# Allegro board Grove_Cape.brd
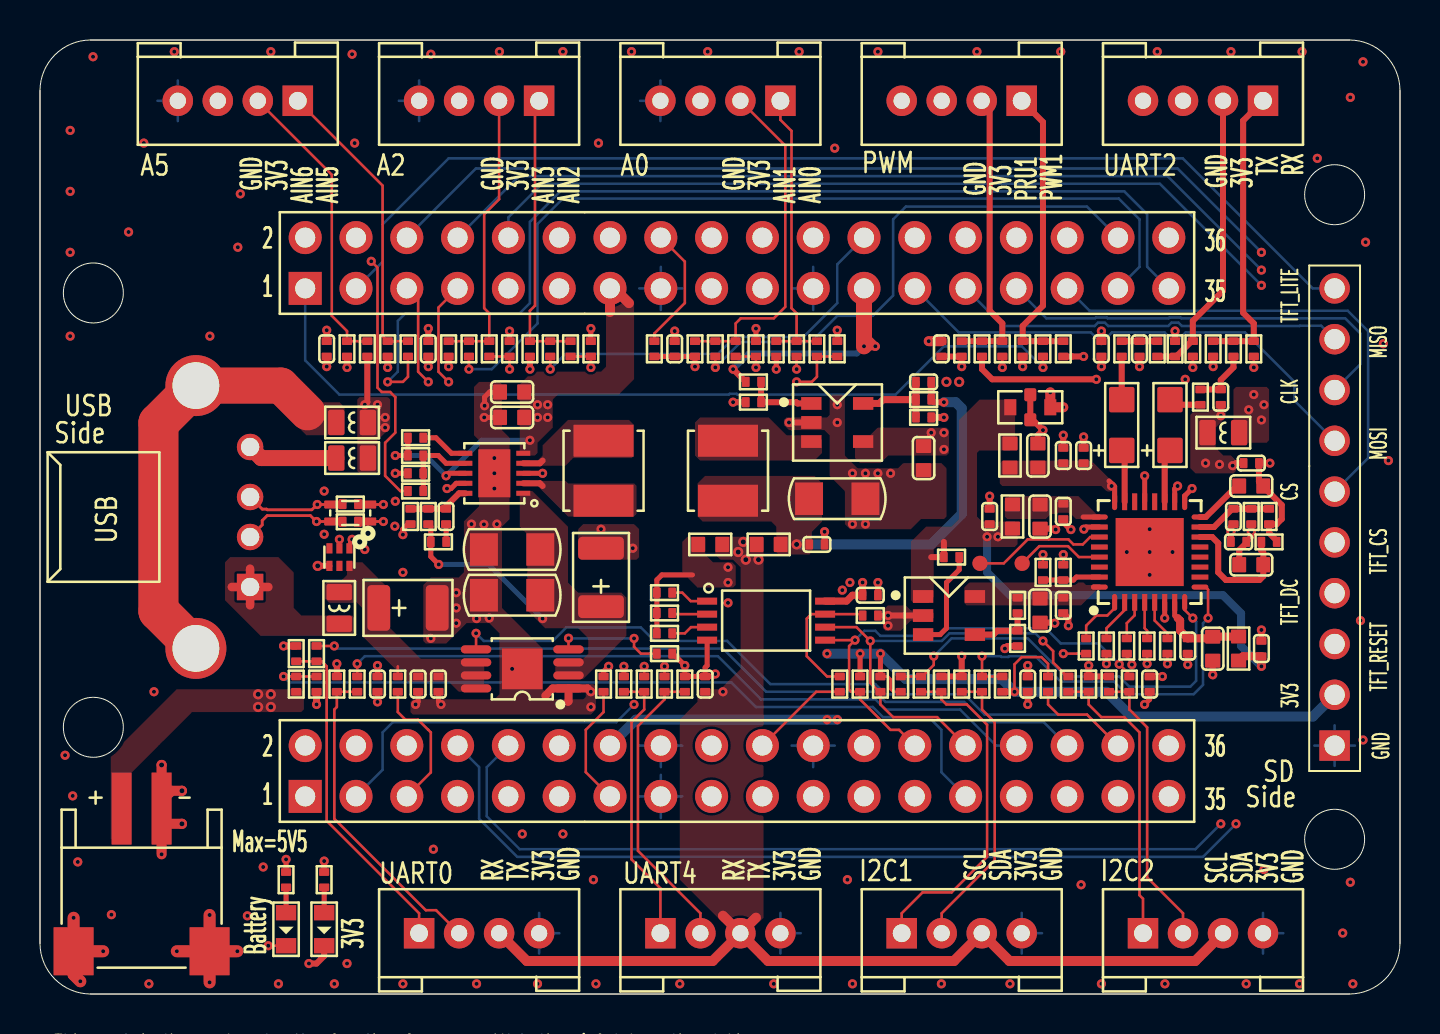
[diagram p0: board, top side]
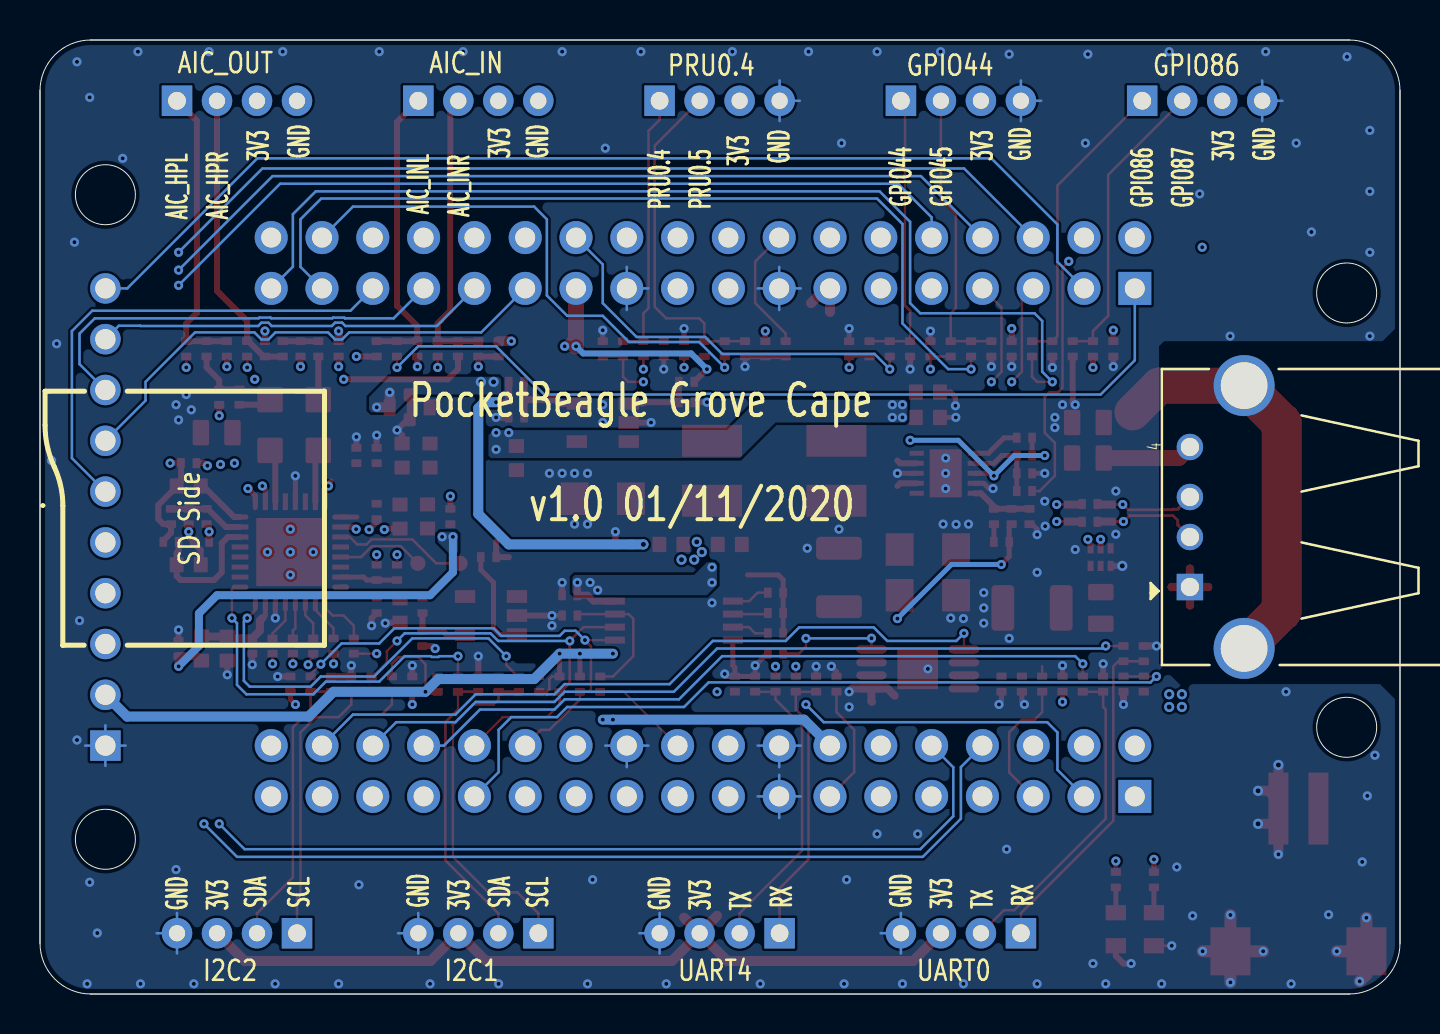
[diagram p1: board, bottom side, seen from below]

Outline 68 x 47.7 mm; copper layers: TOP, GND_2, PWR_3, BOTTOM. Coordinates in mm from the lower left corner of the outline.
Outline path: circle c2.67,35.05 r1.5 ; circle c2.67,13.34 r1.5 ; circle c64.73,39.96 r1.5 ; circle c64.73,7.74 r1.5 ; 0,45.16 0,2.54 ; 0,45.16 arc(0.74,46.96) 2.54,47.7 ; 0,45.16 0,2.54 ; 0,2.54 arc(0.74,0.74) 2.54,0 ; 2.54,47.7 65.46,47.7 ; 2.54,47.7 65.46,47.7 ; 65.46,47.7 arc(67.26,46.96) 68,45.16 ; 2.54,0 65.46,0 ; 2.54,0 65.46,0 ; 65.46,0 arc(67.26,0.74) 68,2.54 ; 68,45.16 68,2.54 ; 68,45.16 68,2.54

## Design rules (mm)
constraint set DEFAULT: min track width 0.127
net group DIFFPAIR36: nets HOST_USB1_DM HOST_USB1_DP
net group USB1: nets USB1_DM USB1_DP

## Placement (name value [footprint] x y rotation side)
C1  100nF  [C0402]  14.34 32.26 270 top
C2  100nF  [C0402]  19.41 32.26 270 top
C3  100nF  [C0402]  31.73 32.26 270 top
C4  100nF  [C0402]  45.07 32.26 270 top
C5  100nF  [C0402]  53.07 32.26 270 top
C6  6.8pF  [C0402]  44.18 30.61 180 top
C7  10uF  [C0603]  23.61 30.1 180 top
C8  0.47uF  [EMI_0805_3]  49.51 29.34 180 top
C9  10uF  [C0603]  23.61 28.83 180 top
C10  47uF  [AVX_A]  54.09 28.45 90 top
C11  47uF  [AVX_A]  56.5 28.45 90 top
C12  100nF  [C0402]  51.16 26.92 90 top
C13  100nF  [C0402]  52.18 26.92 90 top
C14  10uF  [C0603]  49.9 26.92 90 top
C15  10uF  [C0603]  44.18 26.8 270 top
C16  22uF  [C1206]  39.86 24.77 0 top
C17  1uF  [C0603]  60.56 25.4 0 top
C18  100nF  [C0402]  51.16 24.13 270 top
C19  22pF  [C0402]  20.3 23.88 270 top
C20  100nF  [C0402]  47.48 23.88 90 top
C21  10uF  [C0603]  50 23.87 270 top
C22  100nF  [C0402]  38.85 22.48 0 top
C23  22uF  [C1206]  23.61 22.23 180 top
C24  47uF  [AVX_B]  28.05 20.83 90 top
C25  22uF  [C1206]  23.61 19.94 180 top
C26  100nF  [C0402]  41.51 19.94 0 top
C27  1uF  [C0603]  60.56 21.46 180 top
C28  100nF  [C0402]  51.16 19.43 270 top
C29  47uF  [AVX_B]  18.4 19.3 0 top
C30  10uF  [C0603]  50 19.17 270 top
C31  100nF  [C0402]  57.39 17.4 270 top
C32  10uF  [C0603]  58.64 17.27 270 top
C33  100nF  [C0402]  61.07 17.27 90 top
C34  100nF  [C0402]  16.88 15.49 90 top
C35  100nF  [C0402]  18.91 15.49 270 top
C36  100nF  [C0402]  19.92 15.49 270 top
C37  100nF  [C0402]  33.26 15.49 90 top
C38  100nF  [C0402]  49.39 15.49 90 top
C39  100nF  [C0402]  55.48 15.49 90 top
C40  47pF  [C0402]  54.98 32.26 270 top
C41  47pF  [C0402]  59.04 29.84 270 top
C42  47pF  [C0402]  60.56 26.54 180 top
C43  47pF  [C0402]  59.93 22.61 180 top
C44  100nF  [C0402]  59.67 23.88 270 top
D1  TPD1E1B04DPY  [D0402]  16.37 32.26 270 top
D2  TPD1E1B04DPY  [D0402]  17.38 32.26 270 top
D3  TPD1E1B04DPY  [D0402]  20.43 32.26 270 top
D4  TPD1E1B04DPY  [D0402]  24.5 32.26 270 top
D5  TPD1E1B04DPY  [D0402]  32.75 32.26 270 top
D6  TPD1E1B04DPY  [D0402]  36.81 32.26 270 top
D7  TPD1E1B04DPY  [D0402]  46.09 32.26 270 top
D8  TPD1E1B04DPY  [D0402]  49.13 32.26 270 top
D9  TPD1E1B04DPY  [D0402]  56.75 32.26 90 top
D10  TPD1E1B04DPY  [D0402]  58.66 32.26 270 top
D11  TPD1E1B04DPY  [D0402]  12.81 17.02 90 top
D12  TPD1E1B04DPY  [D0402]  14.84 15.49 90 top
D13  TPD1E1B04DPY  [D0402]  29.19 15.49 90 top
D14  TPD1E1B04DPY  [D0402]  32.24 15.49 90 top
D15  TPD1E1B04DPY  [D0402]  45.07 15.49 90 top
D16  TPD1E1B04DPY  [D0402]  46.09 15.49 90 top
D17  TPD1E1B04DPY  [D0402]  52.44 15.49 90 top
D18  TPD1E1B04DPY  [D0402]  53.45 15.49 90 top
FB1  150R  [L0805]  59.17 28.07 180 top
FB2  120R  [L0603]  48.5 26.92 270 top
FB3  120R  [L0603]  48.62 23.88 90 top
FB4  150R  [L0805]  14.96 19.3 270 top
FB5  120R  [L0603]  59.93 17.27 90 top
FB6  150R  [L0805]  15.61 28.57 180 top
FB7  150R  [L0805]  15.61 26.8 180 top
J1  Grove 4P 2.0mm  [HEADER4P-2_0-GROVE-DIP]  9.89 44.66 270 top
J2  Grove 4P 2.0mm  [HEADER4P-2_0-GROVE-DIP]  21.95 44.66 270 top
J3  Grove 4P 2.0mm  [HEADER4P-2_0-GROVE-DIP]  34.02 44.66 270 top
J4  Grove 4P 2.0mm  [HEADER4P-2_0-GROVE-DIP]  46.09 44.66 270 top
J5  Grove 4P 2.0mm  [HEADER4P-2_0-GROVE-DIP]  58.15 44.66 270 top
J6  Header 1x10 2.54mm  [HEADER10P_2D54_DIP]  64.73 12.42 180 top
J7  Header 1x2 2mm  [HW2-SMD-2_0-90D]  5.08 4.32 0 top
J8  Grove 4P 2.0mm  [HEADER4P-2_0-GROVE-DIP]  21.95 3.04 90 top
J9  Grove 4P 2.0mm  [HEADER4P-2_0-GROVE-DIP]  34.02 3.04 90 top
J10  Grove 4P 2.0mm  [HEADER4P-2_0-GROVE-DIP]  46.09 3.04 90 top
J11  Grove 4P 2.0mm  [HEADER4P-2_0-GROVE-DIP]  58.15 3.04 90 top
J12  USB Type A  [USB-003A-4P-90D]  7.79 23.85 90 bottom
L1  3.3uH  [L4X4MM]  28.18 26.16 270 top
L2  1uH  [L4X4MM]  34.4 26.16 270 top
L3  90R  [L2012]  15.51 24.05 180 top
LED1  Green  [LED0603]  12.3 3.24 270 top
LED2  Green  [LED0603]  14.21 3.24 270 top
P1  Header 2x18 2.54mm  [HEADER2X18P_2D54_1_DIP]  13.26 9.88 90 top
P2  Header 2x18 2.54mm  [HEADER2X18P_2D54_1_DIP]  13.26 35.28 90 top
R1  100R  [R0402]  15.35 32.26 270 top
R2  100R  [R0402]  18.4 32.26 270 top
R3  100R  [R0402]  21.45 32.26 270 top
R4  10K  [R0402]  22.46 32.26 270 top
R5  10K  [R0402]  23.48 32.26 90 top
R6  100R  [R0402]  25.51 32.26 270 top
R7  10K  [R0402]  26.53 32.26 270 top
R8  10K  [R0402]  27.54 32.26 90 top
R9  10K  [R0402]  30.72 32.26 270 top
R10  100R  [R0402]  33.77 32.26 270 top
R11  10K  [R0402]  34.78 32.26 270 top
R12  10K  [R0402]  35.8 32.26 90 top
R13  100R  [R0402]  37.83 32.26 270 top
R14  10K  [R0402]  38.85 32.26 270 top
R15  10K  [R0402]  39.86 32.26 90 top
R16  0R  [R0402]  47.1 32.26 270 top
R17  100R  [R0402]  48.12 32.26 270 top
R18  100R  [R0402]  50.15 32.26 270 top
R19  0R  [R0402]  51.16 32.26 270 top
R20  0R  [R0402]  55.86 32.26 90 top
R21  100R  [R0402]  57.64 32.26 270 top
R22  0R  [R0402]  59.67 32.26 270 top
R23  100R  [R0402]  60.69 32.26 270 top
R24  10K  [R0402]  35.67 30.61 0 top
R25  240K  [R0402]  44.18 29.72 180 top
R26  91K  [R0402]  35.67 29.59 180 top
R27  33R  [R0402]  58.02 29.84 90 top
R28  33R  [R0402]  54.09 32.26 90 top
R29  52.3K  [R0402]  44.18 28.83 0 top
R30  0R  [R0402]  18.78 27.81 0 top
R31  0R  [R0402]  18.78 26.92 0 top
R32  0R  [R0402]  18.78 26.04 0 top
R33  0R  [R0402]  18.78 25.15 0 top
R34  2.2k  [R0402]  61.45 23.88 90 top
R35  0R  [R0402]  15.52 24.5 180 top
R36  91K  [R0402]  18.53 23.88 270 top
R37  820K  [R0402]  19.41 23.88 90 top
R38  0R  [R0402]  15.52 23.61 180 top
R39  680K  [R0402]  19.92 22.61 0 top
R40  0R  [R0603]  33.51 22.48 0 top
R41  0R  [R0603]  36.43 22.48 180 top
R42  2.2k  [R0402]  60.56 23.88 90 top
R43  0R  [R0402]  61.45 22.61 0 top
R44  0R  [R0402]  45.58 21.84 0 top
R45  0R  [R0402]  50.15 21.08 270 top
R46  0R  [R0402]  51.16 21.08 270 top
R47  10K  [R0402]  31.23 20.07 0 top
R49  DNP  [R0402]  48.88 19.43 270 top
R50  10K  [R0402]  31.23 19.05 0 top
R51  10K  [R0402]  41.51 18.92 0 top
R52  10K  [R0402]  31.23 18.03 0 top
R53  DNP  [R0402]  48.88 17.78 270 top
R54  0R  [R0402]  52.31 17.4 90 top
R55  0R  [R0402]  53.32 17.4 90 top
R56  0R  [R0402]  54.34 17.4 90 top
R57  0R  [R0402]  55.36 17.4 90 top
R58  0R  [R0402]  56.37 17.4 90 top
R59  100R  [R0402]  13.83 17.02 90 top
R60  10K  [R0402]  31.23 17.02 0 top
R61  20K  [R0402]  12.81 15.49 90 top
R62  10K  [R0402]  13.83 15.49 270 top
R63  100R  [R0402]  15.86 15.49 90 top
R64  0R  [R0402]  17.89 15.49 90 top
R65  0R  [R0402]  28.18 15.49 90 top
R66  100R  [R0402]  30.21 15.49 90 top
R67  100R  [R0402]  31.23 15.49 90 top
R68  0R  [R0402]  39.99 15.49 270 top
R69  10K  [R0402]  41.01 15.49 270 top
R70  10K  [R0402]  42.02 15.49 270 top
R71  10K  [R0402]  43.04 15.49 90 top
R72  100R  [R0402]  44.05 15.49 90 top
R73  100R  [R0402]  47.1 15.49 90 top
R74  10K  [R0402]  48.12 15.49 90 top
R75  10K  [R0402]  50.4 15.49 270 top
R76  100R  [R0402]  51.42 15.49 90 top
R77  100R  [R0402]  54.47 15.49 90 top
R78  680R  [R0402]  12.3 5.71 270 top
R79  680R  [R0402]  14.21 5.71 270 top
TP2  Test Point  [TP30C_SMD]  47 21.53 0 top
TP3  Test Point  [TP30C_SMD]  49.11 21.53 0 top
U1  TLV62569DBVT  [SOT23-5]  39.86 28.57 270 top
U2  MP2155GQ  [QFN10-0_5-3X3X1MM]  22.72 26.04 180 top
U3  TLV320AIC3104  [QFN32_0D5_5X5MM_EP3P3MM]  55.48 22.1 0 top
U4  TPD4S012DRYR  [U_6_DRY]  14.97 21.84 180 top
U5  TLV73318PDBV  [SOT23-5]  45.45 18.92 270 top
U6  CAT24C256YI-GT3  [TSSOP8-0_65-3X4_5X1_2MM]  36.31 18.67 0 top
U7  TPS2051BDGN  [DGN_16X60]  24.11 16.26 90 top

## Library data of the parts
C1-C7 C9 C12-C23 C25-C28 C30-C44 = CC
C8 = EMI_FIL_4P
C10 C11 C24 C29 = CT
D1-D18 = DIODE TVS BI-DIR
FB1-FB7 = FB
J1-J5 J8-J11 = Header_4P
J6 = Header 1x10
J7 = Header_2+2P
J12 = Single USB A
L1 L2 = L
L3 = CL
LED1 LED2 = Single LED
P1 = Header 2x18 Of PocketBeagle P1
P2 = Header 2x18 Of PocketBeagle P2
R1-R47 R49-R79 = R
TP2 TP3 = Test Point
U1 = TLV62569DBVT
U2 = MP2155
U3 = TLV320AIC3104
U4 = TPD4S012
U5 = LDO_5P
U6 = CAT24C256
U7 = TPS2051BDGN

## Footprints (pads in the part's own frame, mm; a bottom-side part is the same pattern mirrored in y, then rotated)
AVX_A
  rrect 1.27x1.27 smd: 1(-1.27,0) 2(1.27,0)
AVX_B
  rrect 1.143x2.286 smd: 1(-1.46,0) 2(1.46,0)
C0402
  rrect 0.385x0.508 smd: 1(-0.383,0) 2(0.383,0)
C0603
  rrect 0.696x0.762 smd: 1(-0.602,0) 2(0.602,0)
C1206
  rect 1.397x1.626 smd: 1(-1.41,0) 2(1.41,0)
D0402
  rrect 0.385x0.508 smd: 1(-0.383,0) 2(0.383,0)
DGN_16X60
  oval 0.406x1.524 smd: 1(-0.975,-2.311) 2(-0.325,-2.311) 3(0.325,-2.311) 4(0.975,-2.311) 5(0.975,2.311) 6(0.325,2.311) 7(-0.325,2.311) 8(-0.975,2.311)
  rect 2.032x2.032 smd: 9(0,0)
EMI_0805_3
  rect 0.6x0.8 smd: 1(-1,0) 3(1,0)
  rrect 0.6x0.65 smd: 2(0,-0.625) 4(0,0.625)
HEADER2X18P_2D54_1_DIP
  rect 1.651x1.651 hole 1: 1(0,0)
  round 1.651 hole 1: 2(2.54,0) 3(0,-2.54) 4(2.54,-2.54) 5(0,-5.08) 6(2.54,-5.08) 7(0,-7.62) 8(2.54,-7.62) 9(0,-10.16) 10(2.54,-10.16) 11(0,-12.7) 12(2.54,-12.7) 13(0,-15.24) 14(2.54,-15.24) 15(0,-17.78) 16(2.54,-17.78) 17(0,-20.32) 18(2.54,-20.32) 19(0,-22.86) 20(2.54,-22.86) 21(0,-25.4) 22(2.54,-25.4) 23(0,-27.94) 24(2.54,-27.94) 25(0,-30.48) 26(2.54,-30.48) 27(0,-33.02) 28(2.54,-33.02) 29(0,-35.56) 30(2.54,-35.56) 31(0,-38.1) 32(2.54,-38.1) 33(0,-40.64) 34(2.54,-40.64) 35(0,-43.18) 36(2.54,-43.18)
HEADER4P-2_0-GROVE-DIP
  rect 1.524x1.524 hole 0.889: 1(0,3)
  round 1.524 hole 0.813: 2(0,1) 3(0,-1) 4(0,-3)
HEADER10P_2D54_DIP
  rect 1.524x1.524 hole 1.016: 1(0,0)
  round 1.524 hole 1.016: 2(0,-2.54) 3(0,-5.08) 4(0,-7.62) 5(0,-10.16) 6(0,-12.7) 7(0,-15.24) 8(0,-17.78) 9(0,-20.32) 10(0,-22.86)
HW2-SMD-2_0-90D
  rect 1x3.6 smd: 1(-1,4.953) 2(1,4.953)
  rect 2x2.4 smd: 3(-3.4,-2.181) 4(3.4,-2.181)
L4X4MM
  rect 1.6x3 smd: 1(-1.5,0) 2(1.5,0)
L0603
  rrect 0.696x0.762 smd: 1(-0.602,0) 2(0.602,0)
L0805
  rrect 0.819x1.27 smd: 1(-0.79,0) 2(0.79,0)
L2012
  rrect 0.75x0.4 smd: 1(-0.925,0.425) 2(0.925,0.425) 3(0.925,-0.425) 4(-0.925,-0.425)
LED0603
  rect 0.762x1.016 smd: 1(-0.826,0) 2(0.826,0)
QFN10-0_5-3X3X1MM
  rect 0.7x0.25 smd: 1(-1.45,1) 2(-1.45,0.5) 3(-1.45,0) 4(-1.45,-0.5) 5(-1.45,-1) 6(1.45,-1) 7(1.45,-0.5) 8(1.45,0) 9(1.45,0.5) 10(1.45,1)
  rect 1.6x2.4 smd: 11(0,0)
QFN32_0D5_5X5MM_EP3P3MM
  oval 0.254x0.838 smd: 1(-1.751,-2.515) 8(1.751,-2.515) 17(1.751,2.515) 24(-1.751,2.515)
  rect 0.254x0.838 smd: 2(-1.251,-2.515) 3(-0.751,-2.515) 4(-0.25,-2.515) 5(0.25,-2.515) 6(0.751,-2.515) 7(1.251,-2.515) 18(1.251,2.515) 19(0.751,2.515) 20(0.25,2.515) 21(-0.25,2.515) 22(-0.751,2.515) 23(-1.251,2.515)
  oval 0.838x0.254 smd: 9(2.515,-1.751) 16(2.515,1.751) 25(-2.515,1.751) 32(-2.515,-1.751)
  rect 0.838x0.254 smd: 10(2.515,-1.251) 11(2.515,-0.751) 12(2.515,-0.25) 13(2.515,0.25) 14(2.515,0.751) 15(2.515,1.251) 26(-2.515,1.251) 27(-2.515,0.751) 28(-2.515,0.25) 29(-2.515,-0.25) 30(-2.515,-0.751) 31(-2.515,-1.251)
  rect 3.404x3.404 smd: 33(0,0)
R0402
  rrect 0.385x0.508 smd: 1(-0.383,0) 2(0.383,0)
R0603
  rrect 0.696x0.762 smd: 1(-0.602,0) 2(0.602,0)
SOT23-5
  rect 0.635x1.016 smd: 1(-0.953,-1.295) 2(0,-1.295) 3(0.953,-1.295) 4(0.953,1.295) 5(-0.953,1.295)
TP30C_SMD
  round 0.762 smd: 1(0,0)
TSSOP8-0_65-3X4_5X1_2MM
  rect 1x0.35 smd: 1(-2.95,0.975) 2(-2.95,0.325) 3(-2.95,-0.325) 4(-2.95,-0.975) 5(2.95,-0.975) 6(2.95,-0.325) 7(2.95,0.325) 8(2.95,0.975)
U_6_DRY
  rect 0.305x0.508 smd: 1(-0.5,-0.439) 2(0,-0.439) 3(0.5,-0.439) 4(0.5,0.439) 5(0,0.439) 6(-0.5,0.439)
USB-003A-4P-90D
  rect 1.321x1.321 hole 0.914: 1(-3.5,2.71)
  round 1.321 hole 0.914: 2(-1,2.71) 3(1,2.71) 4(3.5,2.71)
  round 3.048 hole 2.337: 5(-6.57,0) 6(6.57,0)

## Nets
3V3_FB: C6.2 R25.2 R29.1 U1.5
3V3_SW: L2.1 U1.3
AGND: C4.2 C5.2 C18.2 C20.2 C21.2 C40.2 C41.2 C42.2 C43.2 C44.2 D7.2 D8.2 D9.2 D10.2 FB1.2 J4.4 J5.4 U3.17 U3.26 U3.33
GND: C1.2 C2.2 C3.2 C7.2 C8.2 C8.4 C9.2 C12.2 C13.2 C14.2 C15.2 C16.2 C22.2 C23.2 C24.2 C25.2 C26.2 C28.2 C29.2 C30.2 C31.2 C32.2 C33.2 C34.2 C35.2 C36.2 C37.2 C38.2 C39.2 D1.2 D2.2 D3.2 D4.2 D5.2 D6.2 D11.2 D12.2 D13.2 D14.2 D15.2 D16.2 D17.2 D18.2 FB1.1 FB6.1 FB7.1 J1.4 J2.4 J3.4 J6.1 J7.2 J7.3 J7.4 J8.4 J9.4 J10.4 J11.4 LED1.2(C) LED2.2(C) P1.15 P1.16 P1.22 P2.15 P2.21 R5.2 R8.2 R9.2 R12.2 R15.2 R26.2 R29.2 R32.1 R36.2 R51.2 R53.2 R60.2 R62.2 R65.2 U1.2 U2.3 U2.9 U2.11 U3.6 U3.21 U4.4 U5.2 U6.4 U7.1 U7.9(PAD)
GND_EARTH: FB6.2 J12.5 J12.6
VDD_3V3: C1.1 C2.1 C3.1 C4.1 C5.1 C34.1 C37.1 C38.1 C39.1 J1.3 J2.3 J3.3 J4.3 J5.3 J8.3 J9.3 J10.3 J11.3 R40.2 R41.2 R79.1
AIC_AVDD_3V3: C18.1 C21.1 FB3.2 U3.25
AIC_BCLK: P1.36 R55.1
AIC_DIN: P2.32 R58.1
AIC_DOUT: P2.30 R57.1
AIC_DRVDD_3V3: C12.1 C13.1 C14.1 FB2.2 U3.18 U3.24
AIC_DVDD_1V8: C28.1 C30.1 R49.1 U3.32 U5.5(OUT)
AIC_HPL: C41.1 R22.2 R27.2
AIC_HPR: C40.1 R20.2 R28.2
AIC_INL: C27.2 C43.1 R19.2 R42.1
AIC_INR: C17.2 C42.1 R16.2 R34.1 R43.2
AIC_IOVDD_3V3: C31.1 C32.1 FB5.2 U3.7
AIC_MCLK: P1.29 R54.1
AIC_RESET: P2.28 R45.1
AIC_WCLK: P1.33 R56.1
AIN0(1V8): P1.19 R14.2 R15.1
AIN0/PRU0.4: D6.1 J3.1 R13.1 R14.1
AIN1(1V8): P1.21 R11.2 R12.1
AIN1/PRU0.5: D5.1 J3.2 R10.1 R11.1
AIN2(1V8): P1.23 R7.2 R8.1
AIN2/IO44: D4.1 J2.1 R6.1 R7.1
AIN3(1V8): P1.25 R4.2 R5.1
AIN3/IO45: D3.1 J2.2 R3.1 R4.1
AIN4(1V8): P1.27 R61.2 R62.1
AIN5: D2.1 J1.1 R2.1
AIN5(3V3): P2.35 R2.2
AIN6: D1.1 J1.2 R1.1
AIN6(3V3): P1.2 R1.2
AM3_USB1_VBUS: P1.5 R64.1
BAT_TEMP: P2.16 R9.1
BAT_VIN: J7.1 P2.14 R61.1
BCLK: R55.2 U3.2
DCDC_3V3: C6.1 C16.1 C22.1 L2.2 R25.1 R41.1
DIN: R57.2 U3.4
DOUT: R58.2 U3.5
GPIO20_EEP_WP: P1.20 R68.2
GPIO44: P2.24 R6.2
GPIO45: P2.33 R3.2
GPIO64_LED: P2.20 R78.1
HOST_USB1_DM: J12.2 L3.2 R38.2 U4.2
HOST_USB1_DP: J12.3 L3.3 R35.2 U4.1
HPL: C11.2 R27.1
HPLOUT: C11.1 U3.19
HPR: C10.2 R28.1
HPROUT: C10.1 U3.23
I2C1_SCL: P2.9 R71.2 R72.2 U3.8
I2C1_SDA: P2.11 R73.2 R74.2 U3.9
I2C2_SCL: P1.28 R70.2 R76.2 U6.6
I2C2_SDA: P1.26 R69.2 R77.2 U6.5
LEFT_LOP: TP2.1(TP) U3.27
MCLK: R54.2 U3.1
MIC2L: C27.1 R43.1 U3.14
MIC2R: C17.1 U3.16
MICBIAS: C44.1 R34.2 R42.2 U3.15
MP2155_MODE: P2.18 R33.1
PB_3V3: C8.1 C26.1 J6.2 P1.14 P2.23 R24.1 R40.1 R47.1 R50.1 R52.1 R69.1 R70.1 R71.1 R74.1 R75.1 U6.8
PB_VOUT: C7.1 C9.1 C15.1 P1.24(VOUT) P2.13(VOUT) R30.1 R31.1 U1.4(VIN) U2.5 U2.8
PRU0.4: P1.31 R13.2
PRU0.5: P2.34 R10.2
PRU1.10: P1.35 R17.2
PRU1.10/AIC_INR: D7.1 J4.2 R16.1 R17.1
PWM1A: P2.1 R18.2
PWM1A/AIC_INL: D8.1 J4.1 R18.1 R19.1
RESET: P2.26 R46.1
RIGHT_LOP: TP3.1(TP) U3.29
RX2/AIC_HPL: D10.1 J5.1 R22.1 R23.1
RX_UART0: D11.1 J8.1 R59.1
RX_UART4: D13.1 J9.1 R66.1
SCL_I2C1: D15.1 J10.1 R72.1
SCL_I2C2: D17.1 J11.1 R76.1
SDA_I2C1: D16.1 J10.2 R73.1
SDA_I2C2: D18.1 J11.2 R77.1
SPI1_CLK: J6.8 P2.29
SPI1_CS: J6.6 P2.31
SPI1_MISO: J6.9 P2.27
SPI1_MOSI: J6.7 P2.25
TFT_CARD_CS: J6.5 P2.10
TFT_DC: J6.4 P2.8
TFT_LITE: J6.10 P2.3
TFT_RESET: J6.3 P2.6
TX2/AIC_HPR: D9.1 J5.2 R20.1 R21.1
TX_UART0: D12.1 J8.2 R63.1
TX_UART4: D14.1 J9.2 R67.1
UART0_RX: P1.32 R59.2
UART0_TX: P1.30 R63.2
UART2_RX: P1.8 R23.2
UART2_TX: P1.10 R21.2
UART4_RX: P2.5 R66.2
UART4_TX: P2.7 R67.2
USB1_DM: L3.1 P1.9 R38.1
USB1_DP: L3.4 P1.11 R35.1
USB1_DRVVBUS: P1.3 R60.1 U7.4
USB1_ID: P1.13 R65.1
USB1_OCN: P1.34 R75.2 U7.5
USB1_VBUS: C29.1 C35.1 C36.1 FB4.1 R64.2 U4.6(VBUS) U7.6 U7.7 U7.8
VDAC_3V3: C8.3(OUT) C20.1 C33.1 FB2.1 FB3.1 FB5.1 R44.1 U5.1
VOUT_USB_5V: C23.1 C24.1 C25.1 R37.1 R39.1 U2.1(VOUT) U7.2 U7.3
WCLK: R56.2 U3.3(WCLK)
WP: R51.1 R68.1 U6.7(WP)
N25674303: R44.2 U5.3
N25674638: R45.2 R46.2 U3.31
N25676540: FB4.2 J12.1(VBUS)
N25693204: R24.2 R26.1 U1.1
N25700469: R47.2 U6.1
N25700489: R52.2 U6.3
N25700509: R50.2 U6.2
N25704058: L1.1 U2.4
N25704067: L1.2 U2.2
N25707945: C19.1 R36.1 R37.2 U2.10
N25708464: R30.2 U2.6
N25710467: R31.2 R32.2 R33.2 U2.7
N25712349: C19.2 R39.2
N25750811: R49.2 R53.1 U5.4
N25755713: LED2.1 R79.2
N25755839: LED1.1 R78.2
N25801829: FB7.2 J12.4

Pads without a net: P1 1 4 6 7 12 17 18; P2 2 4 12 17 19 22 36; U3 10 11 12 13 20 22 28 30; U4 3 5

## Via types
v1: diameter 0.457, hole 0.203, TOP to BOTTOM, 292 vias
v2: diameter 0.508, hole 0.254, TOP to BOTTOM, 15 vias

## Routing (per net, layer and track width the routed paths; a pad name or vN(x,y) marks a point on that pad's centre or on a via; arc(x,y) is an arc through that point)
3V3_FB: length 4.5
  TOP w0.35: U1.5 41.97,29.53 42.16,29.72 R25.2 ; R25.2 R29.1 ; R25.2 C6.2
AGND: length 16
  TOP w0.25: v1(57.6,25.27) 57.23,24.9 U3.17 ; v1(52.19,23.24) 52.3,23.35 U3.26
  TOP w0.3: C4.2 D7.2 v1(46.09,31.37) ; C21.2 50.74,23.27 v1(50.78,23.22) ; C5.2 v1(53.07,31.37) ; 56.75,32.64 v1(56.75,33.15) ; D8.2 v1(49.13,31.37) ; 59.67,23.49 59.55,23.36 v1(59.55,23.11) C43.2 ; C40.2 v1(54.98,31.37) ; v1(51.55,23.22) 51.16,23.6 C18.2 ; v1(59.63,26.42) 59.67,26.42 59.8,26.54 C42.2 ; D10.2 v1(58.66,31.37) ; C20.2 v1(47.48,24.89) ; C41.2 v1(59.04,28.91) 59,28.91
  GND_2 w0.427: 43.09,43.65 J4.4 ; J4.4 43.09,45.68 ; J4.4 42.07,44.66 ; 55.15,43.65 J5.4 ; J5.4 54.14,44.66 ; J5.4 55.15,45.68
  vias: v1(54.34,22.1) v1(55.48,23.24) v1(55.48,22.1) v1(55.48,20.95) v1(56.63,22.1) v1(57.26,30.73) v1(58.28,26.54) v1(58.98,26.48)
GND: length 161.5
  TOP w0.127: 12.3,2.41 v1(11.41,2.41)
  TOP w0.25: v1(18.78,14.48) 18.91,14.61 C35.2 ; v1(22.23,29.41) 22.23,29.85 22.48,30.1 C7.2 ; 35.8,32.64 v1(35.8,33.27) ; R60.2 31.65,17.02 v1(32.24,16.43) D14.2 C37.2 ; v1(20.05,14.48) 19.92,14.61 C36.2 ; U3.6 v1(56.23,18.8) ; D13.2 v1(29.19,16.38) ; C37.2 33.64,15.88 v1(33.77,16) ; C37.2 33.26,16.32 33.36,16.42 U6.4 ; 24.17,26.04 v1(25.13,26.04) ; v1(28.43,16.38) 28.18,16.13 R65.2 ; R9.2 C3.2 D5.2 v1(32.75,31.37) ; U2.9 20.81,25.54 20.55,25.27 v1(20.35,25.27) ; 39.86,32.64 v1(39.86,33.19) ; R51.2 v1(42.4,18.92) ; D6.2 v1(36.81,31.24) ; C9.2 v1(22.21,28.83) ; U3.21 v1(55.23,25.91) ; 18.53,23.49 18.39,23.49 18.14,23.24 v1(18.14,22.97) ; 18.4,26.04 v1(17.76,26.04) ; C34.2 v1(16.88,16.43) ; 27.54,32.64 v1(27.54,33.27) ; 23.48,32.64 v1(23.48,33.15)
  TOP w0.3: v1(13.45,1.52) 13.83,1.52 14.21,1.91 14.21,2.41 ; v1(46.09,16.89) D16.2 D15.2 ; C1.2 v1(14.34,31.37) ; C32.2 v1(58.64,15.96) ; C22.2 v1(39.23,23.11) ; C30.2 50.71,18.57 v1(50.74,18.54) ; v1(51.42,18.41) 51.42,18.79 C28.2 ; C14.2 49.9,27.94 v1(50.15,28.19) 49.63,28.71 C8.4 C8.2 ; D3.2 v1(20.43,31.37) ; D2.2 v1(17.38,31.33) ; v1(48.24,17.27) 48.37,17.4 48.88,17.4 ; D1.2 16.37,29.59 v1(16.24,29.46) ; U5.2 v1(42.4,18.92) ; v1(52.44,16.43) D17.2 D18.2 ; 61.07,17.66 v1(61.07,18.2) ; D12.2 v1(14.84,16.51) ; R26.2 v1(34.66,29.59) ; C31.2 v1(57.39,16.47) ; U4.4 v2(13.88,21.41) ; C39.2 56.12,15.88 v1(56.12,15.88) ; C26.2 v1(41.9,20.57) ; U1.2 v1(37.45,28.57) ; C13.2 v1(52.18,27.86) ; C12.2 v1(51.16,27.94) ; C38.2 v1(49.39,16.43) ; v1(24.5,31.24) D4.2 ; C2.2 v1(19.41,31.37)
  TOP w0.35: D11.2 v1(12.18,17.4) ; R62.2 v1(13.83,14.48) ; R29.2 v1(45.2,28.83)
  TOP w0.4: 25.27,14.91 25.63,15.28 U7.1 ; U7.1 27.38,15.28 v1(27.54,15.11) ; U7.1 26.43,14.63 26.4,14.61
  TOP w0.5: 6.08,8.88 J7.2 6.08,9.66 ; 6.08,8.88 6.45,8.51 v2(7.1,8.51) ; 6.08,8.88 v1(6.08,6.99) ; v2(7.1,10.16) 6.58,10.16 6.08,9.66 ; 6.08,9.66 v2(6.08,11.45)
  TOP w0.6: v1(2.02,0.64) 1.68,0.97 J7.3 ; J7.3 v1(1.68,3.81) ; J7.3 v1(3.16,2.14) ; J7.4 v1(8.48,0.58) ; J7.4 v1(9.87,2.14) ; J7.4 v1(8.48,3.95) ; J7.4 v1(6.84,2.14)
  GND_2 w0.427: 31.04,8.8 P1.15 ; P1.15 32.12,9.88 ; P1.15 29.96,9.88 ; P1.15 31.04,10.96 ; J1.4 6.89,45.68 ; J1.4 5.88,44.66 ; J1.4 6.89,43.65 ; J10.4 50.1,3.04 ; J10.4 49.09,4.05 ; J10.4 49.09,2.02 ; P1.22 39.74,12.42 ; P1.22 38.66,13.5 ; P1.22 38.66,11.34 ; P1.22 37.58,12.42 ; P2.15 31.04,36.36 ; P2.15 32.12,35.28 ; P2.15 31.04,34.2 ; P2.15 29.96,35.28 ; J2.4 18.95,45.68 ; J2.4 18.95,43.65 ; J2.4 17.94,44.66 ; P2.21 38.66,36.36 ; P2.21 39.74,35.28 ; P2.21 37.58,35.28 ; P2.21 38.66,34.2 ; J6.1 65.75,12.42 ; J6.1 63.72,12.42 ; J6.1 64.73,13.43 ; J6.1 64.73,11.41 ; P1.16 31.04,13.5 ; P1.16 31.04,11.34 ; P1.16 29.96,12.42 ; P1.16 32.12,12.42 ; 31.02,43.65 J3.4 ; J3.4 31.02,45.68 ; J3.4 30.01,44.66 ; J9.4 37.02,4.05 ; J9.4 37.02,2.02 ; J9.4 38.03,3.04 ; J11.4 61.15,4.05 ; J11.4 62.16,3.04 ; J11.4 61.15,2.02 ; J8.4 24.95,4.05 ; J8.4 25.97,3.04 ; J8.4 24.95,2.02
  BOTTOM w0.127: P1.15 31.04,10.96 ; P1.15 32.12,9.88 ; P1.15 31.04,8.8 ; P1.15 29.96,9.88 ; P2.15 32.12,35.28 ; P2.15 31.04,36.36 ; P2.15 31.04,34.2 ; P2.15 29.96,35.28 ; J9.4 37.02,4.05 ; J9.4 37.02,2.02 ; J9.4 38.03,3.04 ; J10.4 50.1,3.04 ; J10.4 49.09,2.02 ; J10.4 49.09,4.05 ; 64.73,11.41 J6.1 ; J6.1 65.75,12.42 ; J6.1 63.72,12.42 ; J6.1 64.73,13.43 ; J1.4 6.89,45.68 ; J1.4 6.89,43.65 ; J1.4 5.88,44.66 ; J3.4 31.02,45.68 ; J3.4 31.02,43.65 ; J3.4 30.01,44.66 ; J11.4 61.15,4.05 ; J11.4 62.16,3.04 ; J11.4 61.15,2.02 ; 18.95,43.65 J2.4 ; J2.4 17.94,44.66 ; J2.4 18.95,45.68 ; 29.96,12.42 P1.16 ; P1.16 32.12,12.42 ; P1.16 31.04,11.34 ; 37.58,12.42 P1.22 ; P1.22 38.66,11.34 ; P1.22 39.74,12.42 ; 38.66,34.2 P2.21 ; P2.21 38.66,36.36 ; P2.21 37.58,35.28 ; 24.95,2.02 J8.4 ; J8.4 24.95,4.05 ; J8.4 25.97,3.04
  vias: v1(1.25,11.94) v1(1.51,43.18) v1(1.51,40.13) v1(1.51,37.08) v1(1.51,32.89) v1(1.64,9.91) v1(1.89,6.6) v1(2.65,46.86) v1(3.57,3.97) v1(4.43,38.1) v1(5.19,42.55) v1(5.45,0.51) v1(5.7,15.11) v1(6.71,47.12) v1(8.49,32.89) v1(10.02,40.01) v1(10.37,3.91) v1(11.16,6.35) v1(11.54,47.12) v1(11.92,0.51) v1(14.21,25.15) v1(14.21,22.99) v1(14.72,0.51) v1(15.35,1.52) v1(15.61,46.99) v1(15.73,42.55) v1(16.24,22.23) v1(16.88,29.46) v1(17.26,28.83) v1(17.26,28.32) v1(17.74,23.39) v1(17.76,24.64) v1(18.14,21.08) v1(18.14,0.51) v1(19.54,46.99) v1(19.54,17.78) v1(19.67,7.24) v1(20.81,20.07) v1(20.81,19.3) v1(20.81,18.54) v1(21.57,23.5) v1(21.83,18.77) v1(21.83,0.51) v1(22.2,23.48) v1(22.46,18.8) v1(22.72,26.8) v1(22.72,26.04) v1(22.72,25.27) v1(22.84,23.5) v1(22.97,47.12) v1(23.61,16.26) v1(24.11,8) v1(24.88,0.51) v1(26.15,47.12) v1(26.15,8) v1(27.54,14.35) v1(27.67,5.71) v1(27.8,0.51) v1(27.92,42.55) v1(28.05,23.24) v1(29.57,47.12) v1(29.64,22.29) v1(31.99,0.51) v1(33.38,47.12) v1(34.4,19.56) v1(36.69,0.51) v1(37.96,47.12) v1(39.73,42.29) v1(39.86,29.46) v1(39.86,28.57) v1(40.37,5.71) v1(40.62,26.04) v1(40.62,23.5) v1(40.62,0.51) v1(41.27,26.04) v1(41.27,23.5) v1(41.89,47.12) v1(41.89,26.04) v1(42.4,18.41) v1(42.53,26.04) v1(45.07,0.51) v1(46.85,47.12) v1(48.5,0.51) v1(51.04,47.12) v1(52.05,5.46) v1(53.07,0.51) v1(55.86,47.12) v1(56.24,0.51) v1(59.55,47.12) v1(60.31,0.51) v1(60.44,29.21) v1(60.69,29.97) v1(61.07,28.7) v1(61.2,29.46) v1(61.2,6.22) v1(62.98,0.51) v1(63.1,47.12) v1(63.87,41.78) v1(65.14,3.05) v1(65.52,44.83) v1(65.52,5.59) v1(65.64,0.51) v1(66.02,18.67) v1(66.15,46.61) v1(66.15,12.7) v1(66.28,37.59) v1(67.17,32.51) v1(67.42,26.67)
GND_EARTH: length 20.8
  TOP w1.8: J12.6 12.04,30.42 13.38,29.08
  TOP w2: J12.5 5.92,19.15 5.92,28.55 J12.6
VDD_3V3: length 90.1
  TOP w0.25: v1(16.88,14.61) C34.1 ; v1(55.23,14.48) 55.48,14.73 C39.1 ; R79.1 v1(14.21,6.65)
  TOP w0.3: v1(19.41,33.27) 19.41,32.64 ; v1(31.73,33.15) 31.73,32.64 ; C38.1 v1(49.39,14.48) ; v1(14.34,33.19) 14.34,32.64
  TOP w0.4: 53.07,32.64 v1(53.07,33.15)
  TOP w0.5: J11.3 57.76,1.65 48.47,1.65 J10.3 45.7,1.65 36.41,1.65 J9.3 ; 34.15,3.91 J9.3 ; J9.3 33.63,1.65 24.34,1.65 J8.3 ; J9.3 35.8,3.82 ; 45.07,32.64 v1(44.44,32.64)
  PWR_3 w0.427: J4.3 45.93,43.82 ; J4.3 44.24,43.82 ; J4.3 44.24,45.5 ; J4.3 45.93,45.5 ; 58.31,2.2 J11.3 ; J11.3 59.99,3.88 ; J11.3 58.31,3.88 ; J11.3 59.99,2.2 ; 46.24,3.88 J10.3 ; J10.3 47.93,3.88 ; J10.3 47.93,2.2 ; J10.3 46.24,2.2 ; 22.11,3.88 J8.3 ; J8.3 23.8,3.88 ; J8.3 22.11,2.2 ; J8.3 23.8,2.2 ; J5.3 57.99,45.5 ; J5.3 56.31,43.82 ; J5.3 56.31,45.5 ; J5.3 57.99,43.82 ; J3.3 33.86,43.82 ; J3.3 32.18,43.82 ; J3.3 33.86,45.5 ; J3.3 32.18,45.5 ; 34.18,2.2 J9.3 ; J9.3 35.86,3.88 ; J9.3 35.86,2.2 ; J9.3 34.18,3.88 ; 20.11,43.82 J2.3 ; J2.3 21.8,45.5 ; J2.3 21.8,43.82 ; J2.3 20.11,45.5 ; 8.05,43.82 J1.3 ; J1.3 9.73,45.5 ; J1.3 8.05,45.5 ; J1.3 9.73,43.82
  vias: v1(34.15,15.11) v2(34.91,22.1) v2(35.16,22.61) v2(35.29,21.72) v2(35.92,21.72)
AIC_AVDD_3V3: length 0.8
  TOP w0.25: 52.16,23.85 U3.25
AIC_BCLK: length 6.1
  TOP w0.127: R55.1 v1(53.32,16.51)
  PWR_3 w0.127: v1(53.32,16.51) 53.32,15.11 55.3,13.14 55.72,13.14 P1.36
AIC_DIN: length 31.7
  TOP w0.127: R58.1 v1(56.37,16.51)
  PWR_3 w0.127: v1(56.37,16.51) 53.07,19.81 47.1,19.81 46.21,20.7 46.21,24.51 49.01,27.3 49.01,30.35 49.64,30.99 49.64,33.91 50.28,34.54 50.28,36.74 P2.32
AIC_DOUT: length 31.2
  TOP w0.127: R57.1 v1(55.36,16.51)
  PWR_3 w0.127: P2.30 47.48,36.48 47.48,34.42 48.62,33.27 48.62,27.3 45.83,24.51 45.83,20.45 46.85,19.43 52.44,19.43 v1(55.36,16.51)
AIC_DRVDD_3V3: length 5.3
  TOP w0.25: 53.45,25.65 53.73,25.37 U3.24 ; U3.18 56.73,25.25 v1(56.88,25.4)
  PWR_3 w0.3: v1(56.88,25.4) v1(53.58,25.4)
AIC_DVDD_1V8: length 0.3
  TOP w0.25: U3.32 52.68,20.35
AIC_HPL: length 2.9
  TOP w0.3: R27.2 C41.1 59.04,30.7 59.67,31.33 R22.2
AIC_HPR: length 1.8
  TOP w0.3: 55.86,32.64 54.09,32.64
AIC_INL: length 16.5
  TOP w0.3: R19.2 51.61,31.88 51.61,31.88 v1(52.18,31.88) ; 59.96,21.46 59.96,22.19 60.31,22.54 C43.1 60.56,22.86 v1(60.56,23.11) 60.56,23.49
  PWR_3 w0.3: v1(60.56,23.11) 54.47,29.21 53.32,29.21 51.82,30.71 51.82,31.52 v1(52.18,31.88)
AIC_INR: length 22.6
  TOP w0.3: R16.2 47.1,31.24 47.61,30.73 v1(52.82,30.73) ; R43.2 61.84,22.67 61.45,23.05 61.45,23.49 61.83,23.49 62.09,23.75 62.09,24.45 61.16,25.37 C17.2 60.95,25.62 C42.1 v1(61.49,26.54)
  PWR_3 w0.3: v1(61.49,26.54) 60.99,27.05 57.52,27.05 54.72,29.84 53.7,29.84 v1(52.82,30.73)
AIC_IOVDD_3V3: length 4.7
  TOP w0.2: 56.73,18.91 56.85,18.8 56.88,18.8
  TOP w0.25: 56.73,18.91 U3.7
  TOP w0.4: 56.88,18.8 57.01,18.67 57.01,18.16 C31.1 58.55,17.78 C32.1 59.92,17.87 FB5.2
AIC_MCLK: length 9.3
  TOP w0.127: R54.1 51.86,17.02 51.86,17.02 v1(51.16,17.02)
  PWR_3 w0.127: P1.29 49.9,10.96 49.9,12.7 51.16,13.97 v1(51.16,17.02)
AIC_RESET: length 25.3
  TOP w0.127: R45.1 v1(50.15,21.97)
  PWR_3 w0.127: v1(50.15,21.97) 49.51,22.61 49.51,29.97 50.66,31.11 50.66,32.64 52.44,34.42 52.44,38.48 51.93,38.99 47.45,38.99 P2.28
AIC_WCLK: length 12.1
  TOP w0.127: v1(54.59,16.47) 54.59,16.61 54.34,16.86 R56.1
  PWR_3 w0.127: v1(54.59,16.47) 54.59,14.48 55.36,13.72 57.13,13.72 57.64,13.21 57.64,11.96 56.86,11.18 55.2,11.18 P1.33
AIN0(1V8): length 30.7
  TOP w0.127: R15.1 R14.2 38.85,30.86 38.59,30.61 v1(37.83,30.61)
  PWR_3 w0.127: P1.19 37.32,11.08 37.32,13.84 34.42,16.74 34.42,17.93 32.49,19.86 32.49,21.86 32.5,21.86 32.5,28.96 33.55,30.01 37.23,30.01 v1(37.83,30.61)
AIN0/PRU0.4: length 14.4
  TOP w0.127: J3.1 37.02,43.71 37.58,43.15 37.58,34.29 37.83,34.04 37.83,32.64 ; 37.83,32.64 36.81,32.64 ; 37.83,32.64 38.85,32.64
AIN1(1V8): length 32.8
  TOP w0.127: v1(35.8,31.33) R12.1 R11.2
  PWR_3 w0.127: v1(35.8,31.33) 35.21,30.73 33.26,30.73 31.73,29.21 31.73,19.56 33.64,17.65 33.64,16.76 34.66,15.75 34.66,9.02 35.29,8.38 37.16,8.38 P1.21
AIN1/PRU0.5: length 17
  TOP w0.127: 32.75,32.64 34.78,32.64 34.78,33.53 35.04,33.78 36.69,33.78 37.26,34.36 37.26,42.42 J3.2
AIN2(1V8): length 37.8
  TOP w0.127: v1(27.54,31.33) R8.1 R7.2
  PWR_3 w0.127: v1(27.54,31.33) 30.13,31.33 31.35,30.1 31.35,19.43 33.26,17.53 33.26,13.84 32.5,13.08 32.5,9.27 33.77,8 39.32,8 P1.23
AIN2/IO44: length 14.2
  TOP w0.127: J2.1 24.95,44.66 24.75,44.45 24.75,34.42 24.5,34.16 24.5,32.64 26.53,32.64
AIN3(1V8): length 44.8
  TOP w0.127: v1(23.48,31.24) R5.1 R4.2
  PWR_3 w0.127: v1(23.48,31.24) 23.99,30.73 30.08,30.73 30.97,29.84 30.97,19.3 32.88,17.4 32.88,14.1 32.06,13.28 32.06,9.08 33.51,7.62 41.48,7.62 P1.25
AIN3/IO45: length 14.5
  TOP w0.127: 20.43,32.64 22.46,32.64 22.46,34.04 22.21,34.29 22.21,38.99 22.95,39.73 J2.2
AIN4(1V8): length 39.5
  TOP w0.127: v1(12.18,15.88) R61.2 R62.1
  BOTTOM w0.127: v1(12.18,15.88) 12.47,15.58 34.57,15.58 35.8,14.35 41.64,14.35 42.15,13.84 44.43,13.84 45.07,13.21 45.07,11.09 P1.27
AIN5: length 14.9
  TOP w0.127: J1.1 17.13,40.42 17.13,32.9 17.38,32.64 18.4,32.64
AIN5(3V3): length 52.6
  TOP w0.127: R2.2 18.4,30.86 18.15,30.61 v1(17.38,30.61)
  BOTTOM w0.127: v1(17.38,30.61) 17.89,31.11 17.89,33.66 18.27,34.04 23.99,34.04 24.5,34.54 24.5,38.61 26.02,40.13 54.21,40.13 55.36,38.99 55.36,36.36 P2.35
AIN6: length 14.9
  TOP w0.127: 16.37,32.64 15.35,32.64 15.35,33.15 14.59,33.91 14.59,40.96 J1.2
AIN6(3V3): length 22.2
  TOP w0.3: R1.2 v1(15.35,31.33)
  PWR_3 w0.3: P1.2 13.26,16.83 16.75,20.32 16.75,23.24 16.37,23.62 16.37,25.91 14.46,27.81 14.46,30.44 v1(15.35,31.33)
AM3_USB1_VBUS: length 6.8
  TOP w0.127: P1.5 19.54,11.08 19.54,13.08 19.41,13.21 19.41,13.21 18.9,13.72 18.27,13.72 17.89,14.1 R64.1
BAT_TEMP: length 6.3
  TOP w0.127: P2.16 32.24,36.62 32.24,34.55 30.72,33.02 30.72,32.64
BAT_VIN: length 2.2
  PWR_3 w0.927: 29.58,37.82 P2.14 28.5,38.9
  vias: v1(9.89,37.34) v2(10.91,14.99) v2(10.91,14.35) v2(11.54,14.99) v2(11.54,14.35)
BCLK: length 2.2
  TOP w0.127: R55.2 53.32,18.29 54.23,19.2 U3.2
DCDC_3V3: length 16.8
  TOP w0.3: R25.1 44.69,29.59 v1(45.2,29.59)
  TOP w0.35: C6.1 R25.1
  BOTTOM w0.5: v2(37.83,22.48) 44.56,22.48 46.09,24 46.09,29.29 45.78,29.59 v1(45.2,29.59)
DIN: length 1.9
  TOP w0.127: U3.4 55.23,18.29 55.36,18.17 R57.2
DOUT: length 2.1
  TOP w0.127: R58.2 56.37,18.03 55.73,18.67 U3.5
GPIO20_EEP_WP: length 5
  TOP w0.127: P1.20 38.81,15.11 R68.2
GPIO44: length 20.2
  TOP w0.127: R6.2 v1(25.51,31.24)
  BOTTOM w0.127: P2.24 39.86,36.48 39.86,34.54 38.17,32.85 34.74,32.85 33.89,32 26.27,32 v1(25.51,31.24)
GPIO45: length 44.9
  TOP w0.127: v1(21.45,31.24) R3.2
  BOTTOM w0.127: P2.33 54.98,36.35 54.98,38.73 53.94,39.77 26.15,39.77 24.88,38.5 24.88,33.53 22.59,31.24 v1(21.45,31.24)
GPIO64_LED: length 66.5
  TOP w0.25: R78.1 v1(12.3,6.73)
  PWR_3 w0.25: v1(12.3,6.73) 12.3,7.87 9.76,10.41 9.76,17.91 11.54,19.68 11.54,30.48 9.38,32.64 9.38,40.13 10.91,41.66 33.77,41.66 36.12,39.3 P2.20
HOST_USB1_DM: length 8.8
  TOP w0.14: R38.2 15.12,23.62 L3.2 v1(13.83,23.62) 13.81,23.62 13.52,23.92 11.36,23.92 11.11,23.67 11.11,23.46 J12.2 ; U4.2 v1(14.97,22.73)
  PWR_3 w0.14: v1(13.83,23.62) 14.12,23.92 14.91,23.92 15.14,23.69 15.14,23.42 15.04,23.31 14.82,23.31 14.68,23.17 14.68,22.88 14.83,22.73 v1(14.97,22.73)
HOST_USB1_DP: length 8.5
  TOP w0.14: J12.3 11.11,24.24 11.33,24.24 11.36,24.21 13.59,24.21 13.86,24.48 v1(13.86,24.48) L3.3 15.11,24.48 R35.2 ; U4.1 15.47,22.6 v1(15.61,22.73)
  PWR_3 w0.14: v1(15.61,22.73) 15.43,22.91 15.43,23.81 15.03,24.21 14.13,24.21 v1(13.86,24.48)
HPL: length 1.6
  TOP w0.3: C11.2 56.76,29.46 R27.1
HPLOUT: length 2.7
  TOP w0.3: C11.1 56.23,26.91 U3.19
HPR: length 2.2
  TOP w0.3: R28.1 C10.2
HPROUT: length 2.6
  TOP w0.3: U3.23 54.23,27.03 C10.1
I2C1_SCL: length 64.5
  TOP w0.127: U3.8 57.23,19.2 v1(57.64,18.8) ; v1(44.69,16.89) 44.69,16.45 44.11,15.88 R72.2 R71.2
  PWR_3 w0.127: P2.9 24.69,36.55 44.46,36.55 45.07,35.94 45.07,34.78 47.23,32.62 47.23,26.67 44.69,24.13 v1(44.69,16.89)
  BOTTOM w0.127: v1(57.64,18.8) 57.81,18.63 57.81,15.66 57.52,15.37 54.47,15.37 53.96,15.88 51.29,15.88 49.39,17.78 45.58,17.78 v1(44.69,16.89)
I2C1_SDA: length 63.5
  TOP w0.127: v1(47.1,16.89) R73.2 R74.2 ; U3.9 58.28,20.35 58.4,20.22 v1(58.4,18.8)
  PWR_3 w0.127: P2.11 26.98,36.3 44.35,36.3 44.81,35.84 44.81,34.67 46.97,32.51 46.97,26.92 44.18,24.13 44.18,16.64 44.56,16.26 46.47,16.26 v1(47.1,16.89)
  BOTTOM w0.127: v1(47.1,16.89) 48.03,16.89 48.07,16.85 48.42,16.85 48.46,16.89 49.77,16.89 51.04,15.62 53.7,15.62 54.34,14.99 57.68,14.99 58.15,15.46 58.15,18.54 v1(58.4,18.8)
I2C2_SCL: length 22.4
  TOP w0.127: U6.6 40.82,18.34 v1(41.51,17.65) 41.51,15.56 41.96,15.11 R70.2 42.02,14.48 42.66,13.84 44.86,13.84 P1.28 ; R76.2 51.36,15.88 50.66,16.58 50.66,17.14 v1(50.15,17.65)
  BOTTOM w0.127: v1(50.15,17.65) 49.77,18.03 45.47,18.03 45.09,17.65 v1(41.51,17.65)
I2C2_SDA: length 24
  TOP w0.127: U6.5 v1(40.75,17.69) 40.45,17.4 40.45,15.22 40.56,15.11 R69.2 41.01,14.73 42.52,13.21 42.95,13.21 P1.26 ; v1(53.96,16.49) 54.47,15.98 R77.2
  BOTTOM w0.127: v1(53.96,16.49) 52.92,17.53 51.04,17.53 50.28,18.29 45.32,18.29 44.94,17.91 42.02,17.91 41.76,18.16 41.22,18.16 v1(40.75,17.69)
LEFT_LOP: length 6.7
  TOP w0.127: TP2.1 48.19,21.53 49.38,22.73 50.43,22.73 50.44,22.73 51.42,22.73 51.67,22.48 52.14,22.48 52.51,22.85 U3.27
MCLK: length 2.7
  TOP w0.127: R54.2 52.31,18.41 52.82,18.92 53.36,18.92 53.73,19.29 U3.1
MIC2L: length 6.7
  TOP w0.3: U3.14 58.61,22.85 58.91,22.54 58.91,21.08 59.29,20.7 60.97,20.7 61.16,20.89 C27.1 61.16,22.07 61.07,22.16 R43.1
MIC2R: length 2.6
  TOP w0.3: 59.96,25.4 59.84,25.4 58.29,23.85 U3.16
MICBIAS: length 3.8
  TOP w0.3: R34.2 R42.2 C44.1 59.61,24.26 58.7,23.35 U3.15
MP2155_MODE: length 30.6
  TOP w0.127: v1(16.56,36.63) 16.88,36.32 16.88,30.32 17.09,30.1 17.51,30.1 17.76,29.84 17.76,28.07 17.26,27.56 17.26,25.91 18.02,25.15 18.4,25.15
  PWR_3 w0.127: P2.18 32.56,36.8 16.73,36.8 v1(16.56,36.63)
PB_3V3: length 94.5
  TOP w0.127: R70.1 42.4,15.88 42.53,15.75 42.53,15.24 42.66,15.11 R71.1 ; v1(48.73,15.11) 48.73,16.48 49.09,16.84 50.07,16.84 50.4,16.51 R75.1
  TOP w0.25: R69.1 v1(41.01,17.02) ; 32.91,22.45 R40.1 ; 32.62,20.95 31.09,20.95 30.84,20.7 R47.1 R50.1 R52.1 ; R70.1 v1(42.02,17.02)
  TOP w0.3: v1(34.65,31.24) R24.1 ; v1(48.73,15.11) R74.1
  TOP w0.35: v1(41.13,20.58) C26.1 40.62,19.94 40.33,19.64 U6.8
  TOP w0.4: 41.2,32.89 41.26,32.89 v1(41.77,32.38) v1(41.2,32.38)
  TOP w0.5: v1(51.16,29.34) C8.1 v1(50.51,30.08)
  TOP w0.8: P2.23 v1(41.2,32.38)
  PWR_3 w0.8: 44.31,30.61 v2(45.32,30.61) v2(45.96,30.61) ; 44.31,30.61 44.31,30.86 42.78,32.38 v1(41.77,32.38) v1(41.2,32.38) ; 44.31,30.61 44.31,29.59 43.3,28.58 43.3,25.66 42.03,24.39 42.03,23.18 41.13,22.28 v1(41.13,20.58) v1(40.5,20.58) 39.35,19.43 v1(39.35,17.02) 39.35,14.22 ; 39.35,14.22 v1(39.86,13.72) v1(39.35,13.72) 39.35,14.22
  BOTTOM w0.3: v1(41.2,32.38) 40.84,32.03 35.44,32.03 v1(34.65,31.24)
  BOTTOM w0.5: J6.2 63.64,13.87 54.56,13.87 53.33,15.11 v1(48.73,15.11) 48.09,15.75 43.29,15.75 v1(42.02,17.02) v1(41.01,17.02) v1(39.35,17.02) ; v1(39.86,13.72) v1(39.35,13.72) 29.8,13.72 P1.14
  vias: v1(34.4,21.34) v1(34.4,20.57) v1(40.12,20.19)
PB_VOUT: length 30.1
  TOP w0.25: 18.4,27.81 18.4,26.92 v1(17.76,26.92) ; U2.8 20.43,26.04 v1(20.3,25.91)
  TOP w0.3: 28.43,34.04 28.5,34.1
  TOP w0.5: 29.45,34.54 28.71,35.28 P2.13 28.5,34.1
  PWR_3 w0.8: 45.2,27.94 v1(45.2,27.23) 45.2,26.04 43.16,24 43.16,16.38 41.2,14.42 P1.24
  BOTTOM w0.25: v1(24.5,27.69) 22.08,27.69 v1(20.3,25.91) 19.29,26.92 v1(17.76,26.92)
  vias: v1(24.88,29.46) v1(24.88,28.83) v1(25.38,29.46) v1(25.38,28.83) v1(44.56,28.07) v1(45.2,28.07)
PRU0.4: length 49.8
  TOP w0.127: R13.2 v1(37.83,31.24)
  PWR_3 w0.127: v1(37.83,31.24) 36.94,30.35 33.38,30.35 32.11,29.08 32.11,19.68 34.02,17.78 34.02,16.76 35.04,15.75 35.04,9.27 35.54,8.76 36.94,8.76 37.45,9.27 37.45,10.54 38.08,11.18 44.31,11.18 45.07,10.41 45.07,8.51 45.58,8 49.48,8 P1.31
PRU0.5: length 26.9
  TOP w0.127: R10.2 v1(33.77,31.33)
  BOTTOM w0.127: P2.34 52.35,39.37 43.29,39.37 42.66,38.73 42.66,34.92 41.64,33.91 39.86,33.91 38.55,32.6 35.04,32.6 v1(33.77,31.33)
PRU1.10: length 34.6
  TOP w0.127: R17.2 v1(48.12,31.33)
  PWR_3 w0.127: P1.35 55.2,8.64 53.32,8.64 52.85,9.11 52.85,18.49 52.3,19.05 46.59,19.05 45.45,20.19 45.45,24.51 48.12,27.18 v1(48.12,31.33)
PRU1.10/AIC_INR: length 14.5
  TOP w0.3: 46.09,32.64 48.12,32.64 48.12,33.53 47.48,34.16 47.48,44.26 J4.2
PWM1A: length 43.2
  TOP w0.127: R18.2 v1(50.15,31.33)
  BOTTOM w0.127: P2.1 13.26,31.68 14.97,29.97 34.44,29.97 34.48,30.01 34.83,30.01 34.87,29.97 42.78,29.97 45.2,32.38 49.09,32.38 v1(50.15,31.33)
PWM1A/AIC_INL: length 14.9
  TOP w0.3: 51.16,32.64 49.13,32.64 49.13,33.4 50.15,34.42 50.15,43.6 J4.1
RESET: length 28.9
  TOP w0.127: R46.1 v1(51.16,21.97)
  PWR_3 w0.127: v1(51.16,21.97) 50.15,22.99 50.15,27.3 50.66,27.81 50.66,29.46 51.04,29.84 51.04,32.38 52.82,34.16 52.82,38.73 52.05,39.5 45.42,39.5 P2.26
RIGHT_LOP: length 4.4
  TOP w0.127: TP3.1 49.96,22.39 51.4,22.39 51.94,21.85 U3.29
RX2/AIC_HPL: length 14.7
  TOP w0.3: 58.66,32.64 60.69,32.64 60.69,33.53 60.16,34.06 60.16,43.67 J5.1
RX_UART0: length 16.9
  TOP w0.127: D11.1 R59.1 14.08,16.64 14.34,16.38 14.34,8.66 18.95,4.04 J8.1
RX_UART4: length 13.9
  TOP w0.127: D13.1 R66.1 30.21,14.22 29.57,13.59 29.57,6.73 31.02,5.29 J9.1
SCL_I2C1: length 17.3
  TOP w0.127: R72.1 D15.1 45.07,14.73 45.32,14.48 46.34,14.48 47.35,13.46 47.35,6.86 45.58,5.08 44.13,5.08 43.09,4.04 J10.1
SCL_I2C2: length 14.9
  TOP w0.127: J11.1 55.15,4.76 54.98,4.94 54.98,13.08 54.21,13.84 53.07,13.84 52.44,14.47 D17.1 R76.1
SDA_I2C1: length 14.4
  TOP w0.127: J10.2 45.09,4.04 47.74,6.69 47.74,13.59 47.1,14.22 R73.1 D16.1
SDA_I2C2: length 14.2
  TOP w0.127: D18.1 R77.1 54.47,14.22 55.36,13.34 55.36,5.83 57.15,4.04 J11.2
SPI1_CLK: length 21.6
  BOTTOM w0.127: P2.29 50.32,33.78 52.75,33.78 52.79,33.82 53.35,33.82 53.39,33.78 56.44,33.78 56.47,33.82 57.03,33.82 57.07,33.78 65.26,33.78 66.02,33.02 66.02,31.49 J6.8
SPI1_CS: length 24.6
  BOTTOM w0.127: P2.31 52.48,34.16 65.39,34.16 66.41,33.15 66.41,26.79 J6.6
SPI1_MISO: length 19.8
  BOTTOM w0.127: J6.9 64.06,33.41 62.99,33.41 62.98,33.4 57.09,33.4 56.93,33.57 56.58,33.57 56.41,33.4 53.41,33.4 53.24,33.57 52.9,33.57 52.73,33.4 48.16,33.4 P2.27
SPI1_MOSI: length 25.3
  BOTTOM w0.127: P2.25 45.94,33.08 52.54,33.08 52.9,32.73 53.24,32.73 53.6,33.08 56.23,33.08 56.58,32.73 56.93,32.73 57.28,33.08 60.25,33.08 62.72,30.61 62.72,29.67 J6.7
TFT_CARD_CS: length 55.8
  PWR_3 w0.127: J6.5 63.23,24.08 63.23,26.92 62.47,27.69 62.47,34.04 v1(61.07,35.43)
  BOTTOM w0.127: v1(61.07,35.43) 55.99,40.51 25.1,40.51 23.42,38.84 P2.10
TFT_DC: length 62.8
  PWR_3 w0.127: v1(61.07,36.2) 62.72,34.54 62.72,27.81 63.48,27.05 63.48,24.38 63.99,23.88 65.39,23.88 65.77,23.5 65.77,21.08 J6.4
  BOTTOM w0.127: v1(61.07,36.2) 56.37,40.89 23.95,40.89 P2.8
TFT_LITE: length 55.4
  BOTTOM w0.127: J6.10 63.64,35.28 57.13,41.78 20.43,41.78 17.13,38.48 17.13,36.61 P2.3
TFT_RESET: length 68.7
  PWR_3 w0.127: v1(61.07,37.08) 62.98,35.18 62.98,27.94 64.63,26.29 65.52,26.29 66.15,25.65 66.15,19.87 64.73,18.45 J6.3
  BOTTOM w0.127: v1(61.07,37.08) 56.88,41.27 21.8,41.27 P2.6
TX2/AIC_HPR: length 14.7
  TOP w0.3: J5.2 59.15,35.16 57.64,33.66 57.64,32.64 57.58,32.64 56.81,31.88 D9.1 R20.1
TX_UART0: length 16
  TOP w0.127: R63.1 D12.1 14.84,14.35 14.72,14.22 14.72,8.76 19.29,4.19 19.8,4.19 J8.2
TX_UART4: length 14.9
  TOP w0.127: D14.1 R67.1 31.23,14.73 29.9,13.4 29.9,7.16 33.02,4.04 J9.2
UART0_RX: length 39.6
  TOP w0.127: R59.2 v1(14.71,17.4)
  BOTTOM w0.127: P1.32 50.19,13.59 47.23,13.59 46.21,14.61 42.27,14.61 41.77,15.11 36.31,15.11 34.15,17.27 14.84,17.27 v1(14.71,17.4)
UART0_TX: length 35.6
  TOP w0.127: R63.2 v1(15.86,16.51)
  BOTTOM w0.127: v1(15.86,16.51) 16.24,16.89 33.89,16.89 36.05,14.73 41.77,14.73 42.28,14.22 46,14.22 47.8,12.42 P1.30
UART2_RX: length 69
  TOP w0.127: R23.2 v1(60.69,31.33)
  PWR_3 w0.127: v1(60.69,31.33) 62.17,29.85 62.17,27.61 62.98,26.8 62.98,11.68 v1(59.8,8.51)
  BOTTOM w0.127: v1(59.8,8.51) 58.15,6.86 23.86,6.86 21.95,8.76 21.95,11.35 P1.8
UART2_TX: length 70.8
  TOP w0.127: v1(57.64,31.33) R21.2
  PWR_3 w0.127: v1(57.64,31.33) 58.19,31.88 59.29,31.88 60.44,30.73 60.82,30.73 61.91,29.64 61.91,27.48 62.59,26.8 62.59,12.06 v1(59.04,8.51)
  BOTTOM w0.127: v1(59.04,8.51) 57.77,7.24 23.99,7.24 22.34,8.89 22.34,11.34 P1.10
UART4_RX: length 29.9
  TOP w0.127: v1(19.41,30.61) 18.91,31.11 18.91,34.71 P2.5 ; R66.2 v1(30.21,16.38)
  PWR_3 w0.127: v1(30.21,16.38) 30.21,29.34 29.57,29.97 20.05,29.97 v1(19.41,30.61)
UART4_TX: length 29.8
  TOP w0.127: R67.2 v1(31.23,16.38) ; v1(20.43,30.61) 19.92,31.11 19.92,34.32 P2.7
  PWR_3 w0.127: v1(20.43,30.61) 20.73,30.31 29.87,30.31 30.59,29.59 30.59,17.02 v1(31.23,16.38)
USB1_DM: length 20.6
  TOP w0.14: v1(17.17,23.62) 16.44,23.62 16.42,23.61 R38.1
  PWR_3 w0.14: v1(17.17,23.62) 17.45,23.91 18.21,23.91 19,23.12 19,22.53 18.86,22.39 18.73,22.39 18.59,22.25 18.59,21.97 18.73,21.83 18.86,21.83 19,21.69 19,19.18 24.55,13.64 24.55,10.02 24.41,9.88 P1.9
USB1_DP: length 20.6
  TOP w0.14: R35.1 16.41,24.5 16.44,24.48 v1(17.17,24.48)
  PWR_3 w0.14: P1.11 24.98,9.88 24.84,10.02 24.84,13.76 19.29,19.3 19.29,23.24 18.33,24.2 17.45,24.2 v1(17.17,24.48)
USB1_DRVVBUS: length 25.7
  TOP w0.127: v1(29.7,17.78) 29.7,17.36 30.04,17.02 R60.1 ; v1(26.43,17.79) U7.4
  PWR_3 w0.127: v1(29.7,17.78) v1(29.7,14.48)
  BOTTOM w0.127: P1.3 17.13,11.21 17.13,13.08 17.64,13.59 28.81,13.59 v1(29.7,14.48) ; v1(26.43,17.79) 26.44,17.78 v1(29.7,17.78)
USB1_ID: length 6.1
  TOP w0.127: P1.13 27.29,11.09 27.29,13.21 28.18,14.1 R65.1
USB1_OCN: length 40.8
  TOP w0.127: R75.2 50.4,14.48 50.91,13.97 52.35,13.97 P1.34 ; U7.5 v1(21.8,18.03)
  BOTTOM w0.127: P1.34 52.35,13.97 47.23,13.97 46.21,14.99 42.66,14.99 42.65,14.98 42.28,14.98 41.77,15.49 36.52,15.49 34.36,17.65 30.72,17.65 30.04,18.33 26.32,18.33 25.64,17.65 22.18,17.65 v1(21.8,18.03)
USB1_VBUS: length 0.5
  TOP w0.127: R64.2 17.89,16.38
VDAC_3V3: length 21.5
  TOP w0.3: 45.19,22.6 R44.1 44.56,21.84
  TOP w0.4: FB5.1 60.15,16.89 C33.1 v1(61.07,16.38)
  BOTTOM w0.4: v1(61.07,16.38) 60.05,17.4 60.05,19.03 59.15,19.94 48.5,19.94 47.35,21.08 v1(47.35,22.86)
  vias: v1(47.89,22.86)
VOUT_USB_5V: length 8.5
  TOP w0.25: 19.41,23.49 19.54,23.37 R39.1 19.54,21.87 v1(19.94,21.48)
  BOTTOM w0.25: v1(19.94,21.48) 22.42,21.48 v1(25.13,18.77)
WCLK: length 2
  TOP w0.127: U3.3 54.73,18.93 54.34,18.54 R56.2
WP: length 6.9
  TOP w0.127: R51.1 41.06,18.99 U6.7 38.57,18.99 38.34,18.77 38.34,16.89 39.35,15.88 R68.1
N25674303: length 5.1
  TOP w0.25: R44.2 45.96,21.21 45.32,20.57 45.32,18.29 45.01,17.97 U5.3
N25674638: length 2.9
  TOP w0.25: R45.2 R46.2 51.67,20.7 51.82,20.85 52.97,20.85
N25676540: length 3.7
  TOP w0.427: J12.1 11.42,20.35 ; J12.1 10.5,19.44 ; J12.1 9.59,20.35 ; J12.1 10.5,21.26
N25693204: length 3.6
  TOP w0.3: U1.1 37.87,29.53 37.8,29.59 R26.1 R24.2
N25700469: length 1.9
  TOP w0.127: U6.1 32.54,19.64 32.11,20.07 R47.2
N25700489: length 1.9
  TOP w0.127: R52.2 32.24,18.03 32.55,18.34 U6.3
N25700509: length 1.8
  TOP w0.127: U6.2 31.66,18.99 R50.2
N25704058: length 1
  TOP w0.3: 24.17,26.54 25,26.54 25.13,26.67
N25704067: length 1
  TOP w0.3: 25.13,25.4 25,25.54 24.17,25.54
N25707945: length 3.1
  TOP w0.3: R36.1 R37.2 C19.1 20.3,24.38 20.95,25.04 U2.10
N25708464: length 2.4
  TOP w0.25: U2.6 20.57,27.04 19.8,27.81 R30.2
N25710467: length 4
  TOP w0.25: U2.7 20.3,26.54 19.91,26.92 R31.2 R32.2 R33.2
N25712349: length 0.9
  TOP w0.25: R39.2 20.31,23.49 20.3,23.49
N25750811: length 3.1
  TOP w0.3: R49.2 R53.1 47.86,18.16 47.67,17.97 U5.4
N25755713: length 1.3
  TOP w0.25: LED2.1 R79.2
N25755839: length 1.3
  TOP w0.25: LED1.1 R78.2
N25801829: length 4.5
  TOP w0.8: J12.4 11.06,26.8 FB7.2

## Copper pours and planes (outline as drawn; the poured copper is in the pictures)
3V3_SW on TOP: 38.85,27.94 37.32,27.94 36.43,28.83 33,28.83 32.75,28.57 32.75,26.92 33,26.67 38.72,26.67 39.1,27.05 39.1,27.69
AGND on TOP: 59.17,29.21 58.53,29.21 58.4,29.08 57.64,29.08 57.52,28.96 57.52,26.29 57.77,26.04 59.67,26.04 59.8,26.16 59.8,26.67 59.55,26.92 59.17,26.92 58.78,27.3 58.78,28.32 59.29,28.83 59.29,29.08
AGND on GND_2: 57.64,20.7 57.26,20.32 54.34,20.32 53.45,21.21 52.18,21.21 51.67,21.72 51.67,21.84 51.29,22.23 50.02,22.23 49.9,22.1 49.9,21.72 49.13,20.95 46.85,20.95 46.59,21.21 46.59,24.64 47.35,25.4 51.67,25.4 52.56,26.29 52.56,28.83 50.91,30.48 45.96,30.48 45.07,31.37 45.07,38.73 41.51,42.29 41.51,45.59 42.02,46.1 61.58,46.1 62.34,45.34 62.34,43.69 60.82,42.16 60.82,34.42 61.2,34.04 61.2,31.37 61.07,31.24 59.93,31.24 59.29,30.61 59.29,28.07 59.67,27.69 61.45,27.69 62.21,26.92 62.21,21.08 61.58,20.45 59.04,20.45 58.78,20.7
AGND on PWR_3: 59.04,20.45 58.78,20.7 57.64,20.7 57.26,20.32 54.34,20.32 53.45,21.21 52.18,21.21 51.29,22.1 51.29,25.02 52.56,26.29 52.56,28.83 51.29,30.1 51.29,32.13 51.67,32.51 55.86,32.51 59.29,29.08 59.29,28.07 59.67,27.69 61.45,27.69 62.21,26.92 62.21,21.08 61.58,20.45
GND on TOP: 59.8,30.35 61.33,30.35 61.45,30.23 61.45,27.69 61.33,27.56 59.8,27.56 59.67,27.69 59.67,30.23
GND on TOP: 27.16,23.5 29.7,23.5 29.96,23.24 29.96,21.84 29.83,21.72 27.04,21.72 26.91,21.84 26.91,23.24
GND on TOP: 19.16,17.65 19.16,20.45 19.54,20.83 20.94,20.83 21.19,21.08 21.19,23.62 21.95,24.38 21.95,27.69 21.7,27.94 21.7,30.35 21.95,30.61 22.97,30.61 23.1,30.48 23.1,28.19 23.48,27.81 23.48,23.75 23.1,23.37 23.1,19.3 25.13,17.27 25.13,15.24 25.64,14.73 27.16,14.73 27.29,14.86 27.29,15.37 27.42,15.49 27.67,15.49 27.8,15.37 27.8,14.22 27.54,13.97 18.65,13.97 18.53,14.1 18.53,14.61 18.65,14.73 22.72,14.73 22.97,14.99 22.97,18.03 22.46,18.54 21.32,18.54 20.3,17.53 19.29,17.53
GND on TOP: 44.56,19.18 43.55,19.18 43.29,19.43 42.4,19.43 42.15,19.18 42.15,18.29 42.27,18.16 43.04,18.16 43.55,18.67 44.56,18.67 44.69,18.8 44.69,19.05
GND on TOP: 15.86,26.16 15.86,29.72 15.99,29.84 17.38,29.84 17.51,29.72 17.51,28.32 16.88,27.69 16.88,26.16 16.75,26.04 15.99,26.04
GND on TOP: 39.61,29.97 40.12,29.97 40.24,29.84 40.24,26.92 40.88,26.29 42.91,26.29 43.16,26.54 45.07,26.54 45.32,26.29 45.32,23.88 45.2,23.75 44.05,23.75 43.55,23.24 40.5,23.24 40.24,23.5 40.24,25.15 39.48,25.91 39.48,27.94 39.23,28.19 37.45,28.19 37.2,28.45 37.2,28.7 37.32,28.83 39.35,28.83 39.48,28.96 39.48,29.84
GND on BOTTOM: 0.25,45.16 0.92,46.78 2.54,47.45 65.46,47.45 67.08,46.78 67.75,45.16 67.75,2.54 67.08,0.92 65.46,0.25 2.54,0.25 0.92,0.92 0.25,2.54 0.25,14.75 1,15.49 11.03,15.49 12.05,16.51 12.05,32.38 11.79,32.64 0.87,32.64 0.25,33.26 ; 12 cut-outs
GND on GND_2: 0.25,45.16 0.92,46.78 2.54,47.45 65.46,47.45 67.08,46.78 67.75,45.16 67.75,2.54 67.08,0.92 65.46,0.25 2.54,0.25 0.92,0.92 0.25,2.54
GND_EARTH on TOP: 14.08,29.59 13.57,30.1 12.94,30.1 12.43,29.59 12.43,28.83 13.32,27.94 15.1,27.94 15.22,28.07 15.22,29.34 14.97,29.59
VDD_3V3 on TOP: 35.92,22.86 34.02,22.86 33.77,22.61 33.77,21.97 34.02,21.72 34.66,21.72 35.04,21.34 35.04,16.26 34.02,15.24 33,15.24 32.88,15.11 32.88,14.61 31.99,13.72 31.99,5.71 34.27,3.43 35.8,3.43 36.18,3.81 36.18,22.61
VDD_3V3 on PWR_3: 66.66,2.41 65.77,1.52 2.52,1.52 2.14,1.91 2.14,44.83 3.29,45.97 63.23,45.97 66.66,42.55 ; 24 cut-outs
AIC_AVDD_3V3 on TOP: 48.24,23.88 48.24,24.64 48.5,24.89 51.93,24.89 52.82,24 52.82,23.88 52.69,23.75 51.8,23.75 51.55,24 50.53,24 50.28,23.75 48.37,23.75
AIC_DRVDD_3V3 on TOP: 53.7,25.53 53.7,24.89 53.58,24.89 53.07,25.4 48.12,25.4 47.99,25.53 47.99,26.54 48.12,26.67 52.56,26.67
AIC_DVDD_1V8 on TOP: 46.47,20.57 52.18,20.57 52.31,20.45 52.69,20.45 52.82,20.32 52.82,20.19 52.05,19.43 46.34,19.43 46.21,19.56 46.21,20.32
BAT_VIN on TOP: 13.06,15.24 6.84,15.24 3.54,11.94 3.54,7.75 3.67,7.62 4.43,7.62 4.56,7.75 4.56,11.05 7.6,14.1 13.06,14.1 13.19,14.22 13.19,15.11
BAT_VIN on PWR_3: 12.3,13.97 10.27,13.97 10.14,14.1 10.14,17.65 11.92,19.43 11.92,30.48 9.64,32.77 9.64,39.24 11.67,41.27 28.94,41.27 29.83,40.39 29.83,37.34 29.57,37.08 28.05,37.08 27.67,37.47 27.67,38.61 26.78,39.5 12.94,39.5 12.05,38.61 12.05,34.04 13.95,32.13 13.95,18.29 12.68,17.02 12.68,14.35
DCDC_3V3 on TOP: 32.88,25.53 33.26,25.91 38.72,25.91 39.1,25.53 39.1,23.62 38.59,23.11 38.59,22.1 38.47,21.97 36.94,21.97 36.81,22.1 36.81,23.37 36.56,23.62 33.13,23.62 32.88,23.88
PB_3V3 on TOP: 33.13,22.86 32.37,22.86 32.11,22.61 32.11,21.08 32.88,20.32 34.66,20.32 34.78,20.45 34.78,21.46 34.66,21.59 33.64,21.59 33.26,21.97 33.26,22.73
PB_3V3 on BOTTOM: 45.07,30.86 50.53,30.86 51.55,29.84 51.55,29.21 51.42,29.08 50.28,29.08 49.39,29.97 45.07,29.97 44.94,30.1 44.94,30.73
PB_3V3 on BOTTOM: 34.15,21.46 34.15,20.45 34.66,19.94 41.26,19.94 41.39,20.07 41.39,20.83 41.26,20.95 35.29,20.95 34.66,21.59 34.27,21.59
PB_VOUT on TOP: 23.99,26.92 24.75,26.92 24.88,27.05 24.88,27.56 25.64,28.32 25.64,29.72 25.89,29.97 28.94,29.97 29.7,30.73 29.7,35.43 29.57,35.56 28.43,35.56 28.3,35.43 28.3,31.37 28.05,31.11 24.62,31.11 23.99,30.48
PB_VOUT on TOP: 41.01,27.94 41.51,27.94 41.89,28.32 45.32,28.32 45.45,28.19 45.45,27.05 45.32,26.92 42.4,26.92 42.02,26.54 41.01,26.54 40.75,26.8 40.75,27.69
PB_VOUT on BOTTOM: 33.64,28.19 32.11,29.72 24.75,29.72 24.62,29.59 24.62,28.7 24.75,28.57 31.23,28.57 33,26.8 45.45,26.8 45.58,26.92 45.58,27.94 45.32,28.19
PB_VOUT on PWR_3: 45.32,28.32 44.43,28.32 44.31,28.19 44.31,27.18 44.81,26.67 45.45,26.67 45.58,26.8 45.58,28.07
USB1_VBUS on TOP: 15.86,19.56 16.11,19.3 16.11,17.91 17.76,16.26 18.14,16.26 18.27,16.13 18.27,15.75 18.4,15.62 20.43,15.62 20.94,15.11 22.08,15.11 22.21,15.24 22.21,16.64 22.08,16.76 19.03,16.76 17.51,18.29 17.51,20.19 16.11,21.59 15.48,21.59 15.35,21.46 15.35,20.95 15.1,20.7 14.46,20.7 14.21,20.45 14.21,19.81 14.46,19.56
VDAC_3V3 on TOP: 46.85,23.88 46.85,27.05 46.97,27.18 48.5,27.18 48.75,27.43 48.75,29.46 48.5,29.72 46.97,29.72 45.96,28.7 45.96,23.75 45.58,23.37 44.31,23.37 43.55,22.61 43.55,19.68 43.67,19.56 44.43,19.56 44.69,19.81 44.69,22.23 44.81,22.35 48.75,22.35 48.88,22.48 48.88,23.5 48.75,23.62 47.1,23.62
VDAC_3V3 on BOTTOM: 47.23,23.11 47.99,23.11 48.12,22.99 48.12,22.61 47.48,21.97 47.23,21.97 47.1,22.1 47.1,22.99
VOUT_USB_5V on TOP: 24.37,22.99 24.37,19.18 25.26,18.29 26.91,18.29 27.42,17.78 27.42,17.02 27.16,16.76 26.02,16.76 25.77,16.51 25.77,16 26.02,15.75 27.16,15.75 29.32,17.91 29.32,19.81 29.07,20.07 26.91,20.07 26.4,20.57 26.4,23.37 24.62,25.15 24.11,25.15 23.99,25.02 23.99,23.37
N25676540 on TOP: 15.61,18.92 13.06,18.92 12.68,19.3 12.68,21.08 11.92,21.84 9.51,21.84 9.26,21.59 9.26,19.68 11.03,17.91 15.48,17.91 15.73,18.16 15.73,18.8
N25704058 on TOP: 23.99,26.42 26.27,26.42 26.65,26.8 29.57,26.8 29.7,26.92 29.7,28.45 29.45,28.7 26.4,28.7 25.13,27.43 25.13,26.92 24.88,26.67 23.99,26.67
N25704067 on TOP: 26.4,25.53 26.27,25.65 24.11,25.65 24.11,25.4 24.88,25.4 26.4,23.88 29.7,23.88 29.83,24 29.83,25.4 29.7,25.53

## Text on the board
